# Altium PCB Load-Network-PCB.PcbDoc
Units mil, origin at the board's own origin, x right, y up, seen from the top; angles counter-clockwise.
Board outline 6000 x 1990 mil, 2 copper layers (Top Layer, Bottom Layer); 5 components, 2 nets, 18 pads, 0 vias.
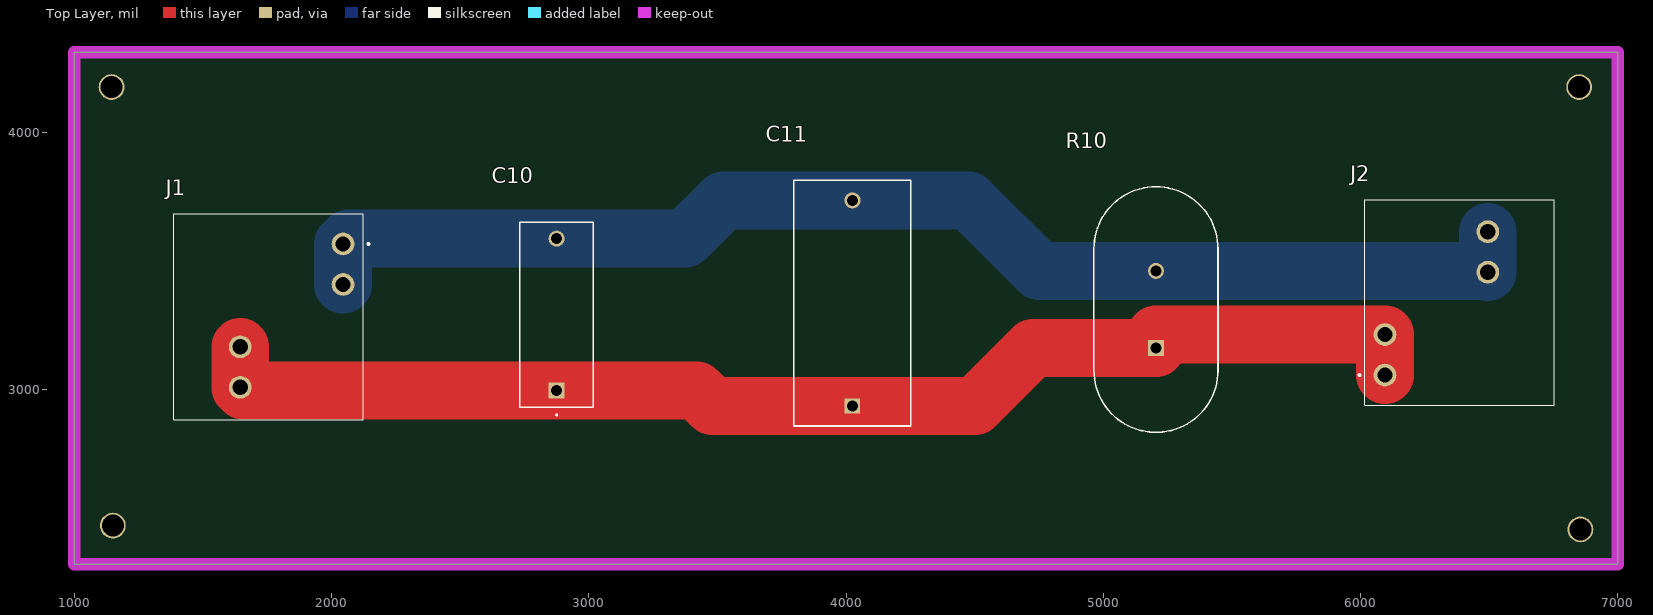
[diagram p0: Top Layer view]
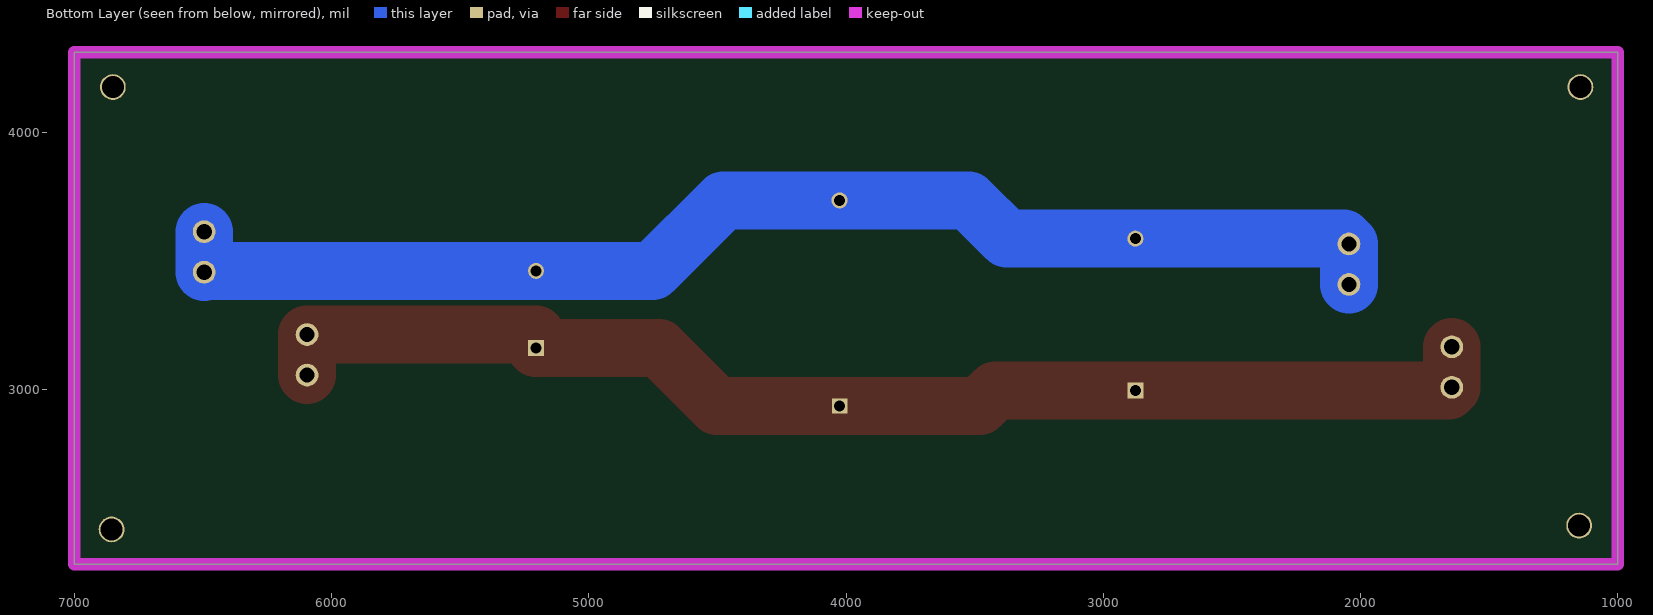
[diagram p1: Bottom Layer view, seen from below]
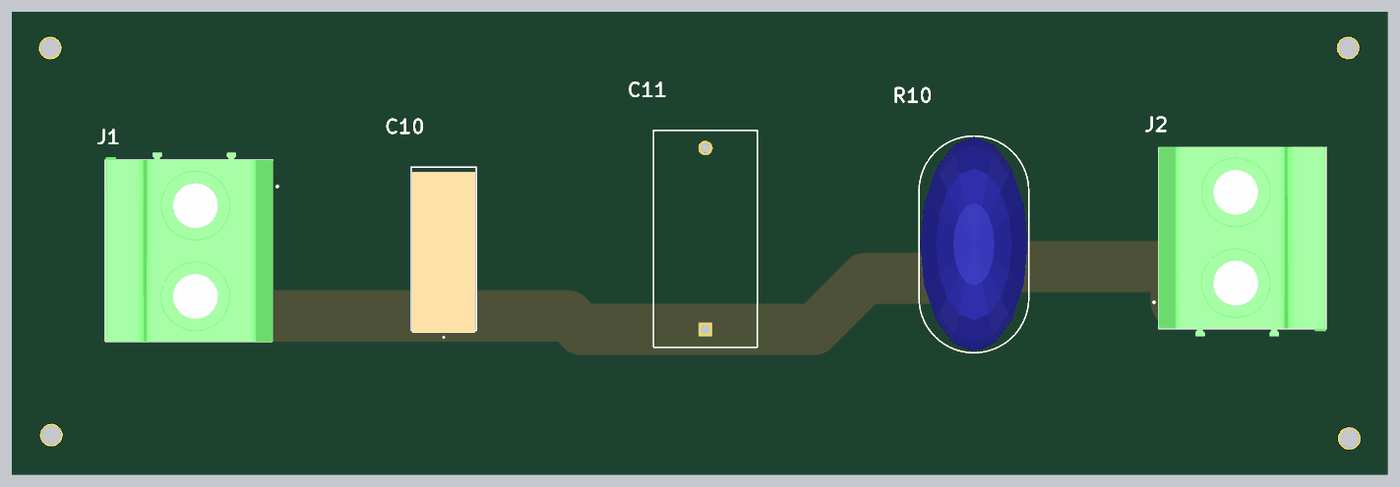
[diagram p2: 3D render of the assembled board from above, using the file's embedded part models]

## Layer stack, top to bottom
Top Solder: solder mask 0.4, Solder Resist, Dk 3.5
Top Layer: signal copper 1.4
Dielectric 1: dielectric 12.6, FR-4, Dk 4.8
Bottom Layer: signal copper 1.4
Bottom Solder: solder mask 0.4, Solder Resist, Dk 3.5

## Board outline
1000,2320 7000,2320 7000,4310 1000,4310

## Design rules (kind name [scope] priority, off if disabled: settings)
Clearance [All] p1: gap=10 ignorepadtopadclearanceinfootprint=FALSE except(0: Arc-Hole Track-Hole SMDPad-Hole THPad-Hole Via-Hole Fill-Hole Poly-Hole Region-Hole Text-Hole; 50: Arc-Arc Arc-Track Track-Track)
Height [All] p1: minheight=0 maxheight=1500 prefheight=500
PolygonConnect [All] p1: connectstyle=Relief reliefconductorwidth=10 reliefentries=4 polygonreliefangle="90 Angle" airgapwidth=10
RoutingVias [All] p1: holewidth=28 width=50 viastyle="Through Hole" minholewidth=28 minwidth=50 maxholewidth=28 maxwidth=50
SolderMaskExpansion [All] p1: expansion=4 istentingtop=FALSE
Width [All] p1: maxlimit=250 minlimit=10 preferedwidth=225 minimp=50.000000 maximp=50.000000 favimp=50.000000
29 further rules are at their usual default settings.

## Components (designator, comment, footprint, x,y, rotation, side; value= is the part's Value field where it differs from the comment)
C10 "2200pF" CAP_B81123C1222M289_TDK 2875,2995 r90 top
C11 "0.1uF" CAPM24X11.3_20.3_1_VIS 4025,2935 r90 top
J1 "Input Transformer" 1709681 2045,3565 r270 top
J2 "Output Outlet" 1709681 6095,3055 r90 top
R10 "Varistor" RES_VE24_AVX 5205,3160 r90 top

## Footprints (in the part's own frame and the unit in brackets; to place one, negate y for a bottom-side part, rotate by r counter-clockwise, add the part's x,y. Pads: shape width x height; smd on the part's side, far side on the other; paste and mask are expansions set on the pad)
1709681 [mm]
  round 2.25 hole 1.5: 1(0,0) 2(4,0) 3(10.16,-10.16) 4(14.16,-10.16)
  silkscreen extent -2.98,-16.72 17.34,2.6, body extent -3.8,-16.68 17.38,2.02, height 31.75
CAP_B81123C1222M289_TDK [mil]
  rect 62x62 hole 42 mask+0: 1(0,0)
  round 62 hole 42 mask+0: 2(590.55,0)
  silkscreen extent -97,-143 655,143, body extent -75,-138 634,138, height 492
CAPM24X11.3_20.3_1_VIS [mil]
  rect 60x60 hole 43 mask+0: 1(0,0)
  round 63 hole 43 mask+0: 2(799.21,0)
  silkscreen extent -78,-227 877,227, body extent 0,0 10,10, height 10
RES_VE24_AVX [mil]
  rect 62x62 hole 42 mask+0: 1(0,0)
  round 62 hole 42 mask+0: 2(300,0)
  silkscreen extent -327,-241 627,241, body extent -322,-236 622,236, height 1063

## Part data
C10: library part B81123C1222M289, "No Description Available", Mfr_Name=TDK, Copyright="Copyright (C) 2022 Ultra Librarian. All rights reserved.", Digi-Key_Part_Number_1=495-76974-1-ND, Digi-Key_Part_Number_2=495-76974-3-ND, Manufacturer_Part_Number=B81123C1222M289, RefDes=RefDes, Type=DEV
C11: library part PME261JC6100KR19T0, "No Description Available", Mfr_Name=Vishay, Copyright="Copyright (C) 2022 Ultra Librarian. All rights reserved.", Digi-Key_Part_Number_1=399-11794-1-ND, Digi-Key_Part_Number_2=399-11794-2-ND, Manufacturer_Part_Number=PME261JC6100KR19T0, RefDes=RefDes, Type=DEV
J1 J2: library part 1709681, "Connector", Manufacturer_Name="Phoenix Contact", Mouser2 Part Number=651-1709681, Datasheet Link=https://componentsearchengine.com//1709681.pdf, Height=31mm, Manufacturer_Part_Number=1709681, Mouser2 Price/Stock=https://www.mouser.com/Search/Refine.aspx?Keyword=651-1709681
R10: library part VE24P00511K--, "No Description Available", Mfr_Name="KYOCERA AVX", Copyright="Copyright (C) 2022 Ultra Librarian. All rights reserved.", Digi-Key_Part_Number_1=VE24P00511K--ND, Manufacturer_Part_Number=VE24P00511K--, RefDes=RefDes, Type=DEV

## Free pads (board coordinates)
  round 100 hole 86: 2(1145,4175) 2(1150,2470) 2(6850,4175) 2(6855,2455)

## Nets (pads, with @x,y where several pads share a name; then routed paths per layer and width w, separated by ;. In a path a pad name is that pad's centre, name@x,y a point inside that pad or via, vN(x,y) a via of type N, cw(c..) or ccw(c..) an arc to the next point about the centre after c; other vN are vias at no path point)
NetC10_1: C10.1 C11.1 J1.3 J1.4 J2.1 J2.2 R10.1 | length 4923
  Top Layer w225: J1.4 J1.3 ; J1.4@1657.52,2995 3420,2995 3480,2935 C11.1 4502,2935 4727,3160 R10.1 5205,3212.48 J2.2 J2.1
NetC10_2: C10.2 C11.2 J1.1 J1.2 J2.3 J2.4 R10.2 | length 4943.6
  Bottom Layer w225: J1.2 J1.1 2065.55,3585.55 3375,3585.55 3523.66,3734.21 C11.2 4477,3734.21 4751.21,3460 J2.3@6490,3460 ; J2.3 J2.4

## Keep-outs
Keep-Out Layer:
  the board outline again, w47.24

## Silkscreen, mask and mechanical layers (free items; w line width, h text height)
Board Outline:
  the board outline again, w47.24